# EAGLE board assyvars (EAGLE 6.4)
VAR1: ASSY-VARIANT; VAR2: ASSY-VARIANT; VAR3: ASSY-VARIANT

No outline drawn. Coordinates in mm, seen from the top.
Copper layers (1*16): Top 0.035mm / dielectric 1.5mm / Bottom 0.035mm
Design rules "default": minimum track width 10mil, minimum drill 24mil, track to track 8mil, track to pad 8mil, pad to pad 8mil, via to via 8mil, smd to smd 8mil, copper to edge 40mil, drill to drill 8mil, minimum pad ring 10mil, minimum via ring 8mil, stop-mask expansion 4mil, vias tented up to drill 0mil, thermal gap 10mil

## Footprints (pad centres in the part's own frame; a part is rotated, then mirrored left to right if it is on the bottom)
C0402 = smd 0.7 x 0.9: 1 -0.65,0; 2 0.65,0

## Placement (x,y rotation side)
R1  1K  [C0402]  30.48,30.48 0 top

## Library data of the parts
R1 = rcl; DIGIKEY-PN: 1; DIGIKEY-PN-VAR2: 2; POPULATE-VAR3: no; VALUE-VAR2: 25k